# EAGLE board CNC_v36 (EAGLE 9.6.2)

Size 171.12 x 101.59 mm. Coordinates in mm from the lower left corner, seen from the top.
Outline: 0,0 171.12,0 171.12,101.59 0,101.59 0,0
Copper layers (1*16): Top 0.035mm / dielectric 1.5mm / Bottom 0.035mm
Design rules "default": minimum track width 6mil, minimum drill 0.35mm, track to track 6mil, track to pad 6mil, pad to pad 6mil, via to via 6mil, smd to smd 6mil, copper to edge 40mil, drill to drill 6mil, minimum pad ring 10mil, minimum via ring 8mil, stop-mask expansion 4mil, vias tented up to drill 0mil, thermal gap 10mil
Net classes: 0 default: width 0.025 mm, clearance 0.051 mm; 1 pow: width 0.025 mm, clearance 0.051 mm

## Footprints (pad centres in the part's own frame; a part is rotated, then mirrored left to right if it is on the bottom)
B2B-XH-A = drill 0.84: 1 0,0; 2 2.5,0
CAPPRD508W65D1000H1100B = drill 0.85 pad 1.45: 1 -2.54,0; 2 2.54,0
CAPPRD550W60D1200H2000B = drill 0.8 pad 1.4: 1 -2.75,0; 2 2.75,0
DO41-10 = drill 1.118: A 5.08,0; C -5.08,0
TO92 = drill 0.813 octagon: 1 -1.27,0; 2 0,1.905; 3 1.27,0
TO220AV = drill 1.016 long: B -2.54,-2.54; C 0,-2.54; E 2.54,-2.54
RESAD724W46L381D178B = drill 0.66 pad 1.26: 1 -3.62,0; 2 3.62,0
1X04/90 = drill 1.016 long: 1 -3.81,-3.81; 2 -1.27,-3.81; 3 1.27,-3.81; 4 3.81,-3.81
1X08 = drill 1.016 long: 1 -8.89,0; 2 -6.35,0; 3 -3.81,0; 4 -1.27,0; 5 1.27,0; 6 3.81,0; 7 6.35,0; 8 8.89,0
BLUE_PILL_ADV = drill 0.8 pad 1.93 octagon: P$1 10.16,-30.48; P$2 10.16,-27.94; P$3 10.16,-25.4; P$4 10.16,-22.86; P$5 10.16,-20.32; P$6 10.16,-17.78; P$7 10.16,-15.24; P$8 10.16,-12.7; P$9 10.16,-10.16; P$10 10.16,-7.62; P$11 10.16,-5.08; P$12 10.16,-2.54; P$13 10.16,0; P$14 10.16,2.54; P$15 10.16,5.08; P$16 10.16,7.62; P$17 10.16,10.16; P$18 10.16,12.7; P$19 10.16,15.24; P$20 10.16,17.78; P$21 -5.08,-30.48; P$22 -5.08,-27.94; P$23 -5.08,-25.4; P$24 -5.08,-22.86; P$25 -5.08,-20.32; P$26 -5.08,-17.78; P$27 -5.08,-15.24; P$28 -5.08,-12.7; P$29 -5.08,-10.16; P$30 -5.08,-7.62; P$31 -5.08,-5.08; P$32 -5.08,-2.54; P$33 -5.08,0; P$34 -5.08,2.54; P$35 -5.08,5.08; P$36 -5.08,7.62; P$37 -5.08,10.16; P$38 -5.08,12.7; P$39 -5.08,15.24; P$40 -5.08,17.78 | drill 1.1 pad 1.93 octagon: P$42 -1.27,-20.32; P$43 -1.27,-17.78; P$44 -1.27,-15.24; P$45 1.27,-15.24; P$46 1.27,-17.78; P$47 1.27,-20.32
A4988 = drill 1.016: 1 -6.35,8.89; 2 -6.35,6.35; 3 -6.35,3.81; 4 -6.35,1.27; 5 -6.35,-1.27; 6 -6.35,-3.81; 7 -6.35,-6.35; 8 -6.35,-8.89; 9 6.35,-8.89; 10 6.35,-6.35; 11 6.35,-3.81; 12 6.35,-1.27; 13 6.35,1.27; 14 6.35,3.81; 15 6.35,6.35; 16 6.35,8.89
B4B-XH-A = drill 0.84: 1 0,0; 2 2.5,0; 3 5,0; 4 7.5,0

## Placement (x,y rotation side)
24V  3A/250V  [B2B-XH-A]  162.56,93.98 0 top
C_PROBE  10u  [CAPPRD508W65D1000H1100B]  27.94,38.1 180 top
C_VDD  100u  [CAPPRD508W65D1000H1100B]  15.24,69.85 0 top
C_VMOT  4700u  [CAPPRD550W60D1200H2000B]  163.83,76.2 180 top
D1  1N4004  [DO41-10]  -46.99,106.68 0 top  (outside the outline)
PROBE  3A/250V  [B2B-XH-A]  27.94,25.4 0 top
Q1  NPN  [TO92]  -60.96,105.41 0 top  (outside the outline)
Q2  TIP42C  [TO220AV]  8.89,36.83 0 top
R1  10  [RESAD724W46L381D178B]  -73.66,96.52 0 top  (outside the outline)
RB  12k  [RESAD724W46L381D178B]  8.89,20.32 0 top
RB1  1k  [RESAD724W46L381D178B]  -26.67,106.68 0 top  (outside the outline)
RB2  1k  [RESAD724W46L381D178B]  -35.56,106.68 0 top  (outside the outline)
SPINDLE  3A/250V  [B2B-XH-A]  -71.12,87.63 0 top  (outside the outline)
TFT_SD_1  PINHD-1X4/90  [1X04/90]  49.53,13.97 180 top
TFT_SD_2  PINHD-1X8  [1X08]  49.53,39.37 0 top
U$1  [BLUE_PILL_ADV]  40.64,53.34 90 top
X_DRV  2986-A4988  [A4988]  22.86,83.82 90 top
X_JST  3A/250V  [B4B-XH-A]  19.05,96.52 0 top
Y_DRV  2986-A4988  [A4988]  52.07,83.82 90 top
Y_JST  3A/250V  [B4B-XH-A]  48.26,96.52 0 top
Z_DRV  2986-A4988  [A4988]  81.28,83.82 90 top
Z_JST  3A/250V  [B4B-XH-A]  77.47,96.52 0 top

## Library data of the parts
24V PROBE SPINDLE = Connector; CATEGORY: CONNECTOR; DESCRIPTION: 2.5mm pitch/disconnectable crimp style connector; MANUFACTURER: JST (XH CONNECTOR); MPN: B2B-XH-A; OPERATING_TEMPERATURE: -25°C ~ 85°C; PART_STATUS: ACTIVE; ROHS_COMPLIANT: COMPLIANT; SERIES: B_B-XH-A; SUB_CATEGORY: Through hole connector; TYPE: top entry
C_PROBE C_VDD C_VMOT = Capacitor; CATEGORY: Capacitor
D1 = diode
Q1 = Transistor; CATEGORY: Transistor; SUB-CATEGORY: BJT; TYPE: NPN
Q2 = TIP42C; AVAILABILITY: In Stock; DESCRIPTION: Bipolar (BJT) Transistor PNP 100 V 6 A 3MHz 2 W Through Hole TO-220-3; MF: onsemi; MP: TIP42C; PACKAGE: TO-220-3 ON; PRICE: None; PURCHASE-URL: https://pricing.snapeda.com/search?q=TIP42C&ref=eda
R1 RB RB1 RB2 = Resistor; CATEGORY: Resistor; SUB-CATEGORY: Fixed
TFT_SD_1 TFT_SD_2 = Connector; CATEGORY: CONNECTOR; SUB-CATEGORY: PIN-HEADER
U$1 = BluePill
X_DRV Y_DRV Z_DRV = pololu-stepper-driver
X_JST Y_JST Z_JST = Connector; CATEGORY: CONNECTOR; DSECRIPTION: 2.5mm pitch/disconnctable crimp style connector; MANUFACTURER: JST (XH connector); MPN: B4B-XH-A; OPERATING_TEMPERATURE: -25 C to 85 C; PART_STATUS: ACTIVE; ROHS_COMPLIANT: COMPLAINT; SERIES: B4B-XH-A; SUB_CATEGORY: Through hole; TYPE: TOP ENTRY

## Nets
+3.3V: C_VDD.1 PROBE.1 TFT_SD_2.8 U$1.P$20 U$1.P$23 X_DRV.2 X_DRV.3 X_DRV.4 X_DRV.5 X_DRV.6 X_DRV.10 Y_DRV.2 Y_DRV.3 Y_DRV.4 Y_DRV.5 Y_DRV.6 Y_DRV.10 Z_DRV.2 Z_DRV.3 Z_DRV.4 Z_DRV.5 Z_DRV.6 Z_DRV.10
+24V [pow]: 24V.2 C_VMOT.1 Q2.E RB1.2 X_DRV.16 Y_DRV.16 Z_DRV.16
GND: 24V.1 C_PROBE.2 C_VDD.2 C_VMOT.2 Q1.1 R1.1 SPINDLE.1 TFT_SD_2.7 U$1.P$19 U$1.P$21 U$1.P$22 X_DRV.9 X_DRV.15 Y_DRV.9 Y_DRV.15 Z_DRV.9 Z_DRV.15
N$4: Q1.2 RB.2
N$5: Q1.3 RB1.1 RB2.1
N$6 [pow]: D1.A R1.2
N$7: D1.C Q2.C SPINDLE.2
N$8: Q2.B RB2.2
N$11 [pow]: Y_DRV.11 Y_JST.4
N$12 [pow]: Y_DRV.12 Y_JST.3
N$13 [pow]: Y_DRV.13 Y_JST.2
N$14 [pow]: Y_DRV.14 Y_JST.1
N$27 [pow]: Z_DRV.11 Z_JST.4
N$28 [pow]: Z_DRV.12 Z_JST.3
N$29 [pow]: Z_DRV.13 Z_JST.2
N$30 [pow]: Z_DRV.14 Z_JST.1
N$43 [pow]: X_DRV.11 X_JST.4
N$44 [pow]: X_DRV.12 X_JST.3
N$45 [pow]: X_DRV.13 X_JST.2
N$46 [pow]: X_DRV.14 X_JST.1
PROBE_IN: C_PROBE.1 PROBE.2 U$1.P$37
SD_CS: TFT_SD_1.1 U$1.P$28
SPI_CLK: TFT_SD_1.4 U$1.P$31
SPI_MISO: TFT_SD_1.3 U$1.P$30
SPI_MOSI: TFT_SD_1.2 U$1.P$29
SPINDLE_PWM: RB.1 U$1.P$16
X_DIR: U$1.P$11 X_DRV.8
X_EN: U$1.P$13 X_DRV.1
X_STEP: U$1.P$12 X_DRV.7
Y_DIR: U$1.P$8 Y_DRV.8
Y_EN: U$1.P$10 Y_DRV.1
Y_STEP: U$1.P$9 Y_DRV.7
Z_DIR: U$1.P$5 Z_DRV.8
Z_EN: U$1.P$7 Z_DRV.1
Z_STEP: U$1.P$6 Z_DRV.7

## Tracks (layer width: path | path; a pad name or v marks a point on that pad's centre or on a via)
+3.3V  (22 unrouted)
+24V  (6 unrouted)
GND  (16 unrouted)
N$4  (1 unrouted)
N$5  (2 unrouted)
N$6  (1 unrouted)
N$7  (2 unrouted)
N$8  (1 unrouted)
N$11  (1 unrouted)
N$12  (1 unrouted)
N$13  (1 unrouted)
N$14  (1 unrouted)
N$27  (1 unrouted)
N$28  (1 unrouted)
N$29  (1 unrouted)
N$30  (1 unrouted)
N$43  (1 unrouted)
N$44  (1 unrouted)
N$45  (1 unrouted)
N$46  (1 unrouted)
PROBE_IN  (2 unrouted)
SD_CS  (1 unrouted)
SPI_CLK  (1 unrouted)
SPI_MISO  (1 unrouted)
SPI_MOSI  (1 unrouted)
SPINDLE_PWM  (1 unrouted)
X_DIR  (1 unrouted)
X_EN  (1 unrouted)
X_STEP  (1 unrouted)
Y_DIR  (1 unrouted)
Y_EN  (1 unrouted)
Y_STEP  (1 unrouted)
Z_DIR  (1 unrouted)
Z_EN  (1 unrouted)
Z_STEP  (1 unrouted)